# EAGLE board CT_schematic (EAGLE 7.6.0)

Size 100 x 80 mm. Coordinates in mm from the lower left corner, seen from the top.
Outline: 0,0 100,0 100,80 0,80 0,0
Copper layers (1*16): Top 0.035mm / dielectric 1.5mm / Bottom 0.035mm
Design rules "default": minimum track width 10mil, minimum drill 24mil, track to track 8mil, track to pad 8mil, pad to pad 8mil, via to via 8mil, smd to smd 8mil, copper to edge 40mil, drill to drill 8mil, minimum pad ring 10mil, minimum via ring 8mil, stop-mask expansion 4mil, vias tented up to drill 0mil, thermal gap 10mil

## Footprints (pad centres in the part's own frame; a part is rotated, then mirrored left to right if it is on the bottom)
C0603 = smd 0.8 x 0.8: 1 -0.762,0; 2 0.762,0
C0402 = smd 0.5 x 0.5: 1 -0.508,0; 2 0.508,0
C0805 = smd 1.2 x 1.3: 1 -1.016,0; 2 1.016,0
C1210 = smd 1.2 x 2.5: 1 -1.524,0; 2 1.524,0
C1206 = smd 1.3 x 1.6: 1 -1.524,0; 2 1.524,0
L0603 = smd 0.8 x 0.8: 1 -0.762,0; 2 0.762,0
DR1040 = smd 1.6 x 3.2: 1 -4.458,0; 2 4.458,0
R0603 = smd 0.8 x 0.8: 1 -0.762,0; 2 0.762,0
LQFP48 = smd 0.3 x 1.2: 1 -2.75,-4.25; 2 -2.25,-4.25; 3 -1.75,-4.25; 4 -1.25,-4.25; 5 -0.75,-4.25; 6 -0.25,-4.25; 7 0.25,-4.25; 8 0.75,-4.25; 9 1.25,-4.25; 10 1.75,-4.25; 11 2.25,-4.25; 12 2.75,-4.25; 25 2.75,4.25; 26 2.25,4.25; 27 1.75,4.25; 28 1.25,4.25; 29 0.75,4.25; 30 0.25,4.25; 31 -0.25,4.25; 32 -0.75,4.25; 33 -1.25,4.25; 34 -1.75,4.25; 35 -2.25,4.25; 36 -2.75,4.25 | smd 1.2 x 0.3: 13 4.25,-2.75; 14 4.25,-2.25; 15 4.25,-1.75; 16 4.25,-1.25; 17 4.25,-0.75; 18 4.25,-0.25; 19 4.25,0.25; 20 4.25,0.75; 21 4.25,1.25; 22 4.25,1.75; 23 4.25,2.25; 24 4.25,2.75; 37 -4.25,2.75; 38 -4.25,2.25; 39 -4.25,1.75; 40 -4.25,1.25; 41 -4.25,0.75; 42 -4.25,0.25; 43 -4.25,-0.25; 44 -4.25,-0.75; 45 -4.25,-1.25; 46 -4.25,-1.75; 47 -4.25,-2.25; 48 -4.25,-2.75
SAMTEC_FTSH-105-01-L-DV-K = smd 0.762 x 2.794: 1 -2.54,-2.032; 2 -2.54,2.032; 3 -1.27,-2.032; 4 -1.27,2.032; 5 0,-2.032; 6 0,2.032; 7 1.27,-2.032; 8 1.27,2.032; 9 2.54,-2.032; 10 2.54,2.032
SOIC-8 = smd 1.6 x 0.6: 1 -2.7,1.905 | smd 1.55 x 0.6: 2 -2.7,0.635; 3 -2.7,-0.635; 4 -2.7,-1.905; 5 2.7,-1.905; 6 2.7,-0.635; 7 2.7,0.635; 8 2.7,1.905
WNG008 = smd 0.45 x 0.55: 1 -1.27,0; 2 0,0; 3 1.27,0; 4 2.54,0; 5 2.54,7.5; 6 1.27,7.5; 7 0,7.5; 8 -1.27,7.53 | smd 4.9 x 4.75: PAD 0.635,3.75
TSSOP20-I = smd 0.4 x 1.35: 1 -2.925,-2.875; 2 -2.275,-2.875; 3 -1.625,-2.875; 4 -0.975,-2.875; 5 -0.325,-2.875; 6 0.325,-2.875; 7 0.975,-2.875; 8 1.625,-2.875; 9 2.275,-2.875; 10 2.925,-2.875; 11 2.925,2.875; 12 2.275,2.875; 13 1.625,2.875; 14 0.975,2.875; 15 0.325,2.875; 16 -0.325,2.875; 17 -0.975,2.875; 18 -1.625,2.875; 19 -2.275,2.875; 20 -2.925,2.875
182-009-MALE = drill 1.194 pad 1.524 octagon: 1 -5.537,10.923; 2 -2.769,10.923; 3 0,10.923; 4 2.769,10.923; 5 5.537,10.923; 6 -4.153,8.08; 7 -1.384,8.08; 8 1.384,8.08; 9 4.153,8.08 | hole 3.048: -12.446,9.501; 12.446,9.501
SSOP-28 = smd 1.5 x 0.4: 1 -3.625,4.225; 2 -3.625,3.575; 3 -3.625,2.925; 4 -3.625,2.275; 5 -3.625,1.625; 6 -3.625,0.975; 7 -3.625,0.325; 8 -3.625,-0.325; 9 -3.625,-0.975; 10 -3.625,-1.625; 11 -3.625,-2.275; 12 -3.625,-2.925; 13 -3.625,-3.575; 14 -3.625,-4.225; 15 3.625,-4.225; 16 3.625,-3.575; 17 3.625,-2.925; 18 3.625,-2.275; 19 3.625,-1.625; 20 3.625,-0.975; 21 3.625,-0.325; 22 3.625,0.325; 23 3.625,0.975; 24 3.625,1.625; 25 3.625,2.275; 26 3.625,2.925; 27 3.625,3.575; 28 3.625,4.225
ABLS-25.000MHZ-B2F-T = smd 5.6 x 2.8: 1 -3.81,0; 2 5.69,0
ASEK = smd 1.4 x 1: 1 -1.1,-0.8; 2 1.1,-0.8; 3 1.1,0.8; 4 -1.1,0.8
TSOT-23-5 = smd 1.3 x 0.62: 1 -1.31,0.95; 2 -1.31,0; 3 -1.31,-0.95; 4 1.31,-0.95; 5 1.31,0.95
SOIC-8_EP = smd 1.6 x 0.533: 1 -2.921,1.905; 2 -2.921,0.635; 3 -2.921,-0.635; 4 -2.921,-1.905; 5 2.921,-1.905; 6 2.921,-0.635; 7 2.921,0.635; 8 2.921,1.905 | smd 2.54 x 3.302: EPAD 0,0 | drill 0.406 pad 0.406: P$1 -0.508,0.635; P$2 0.381,0.635; P$3 -0.508,-0.635; P$4 0.381,-0.635
DFN8_2X3MC = smd 0.813 x 0.305: 1 -1.398,0.75; 2 -1.398,0.25; 3 -1.398,-0.25; 4 -1.398,-0.75; 5 1.398,-0.75; 6 1.398,-0.25; 7 1.398,0.25; 8 1.398,0.75 | smd 1.753 x 1.549: 9 0,0
JST-2-SMD = smd 1 x 4.6: 1 -1,-3.7; 2 1,-3.7 | smd 1.6 x 3.4: NC1 -3.4,1.5; NC2 3.4,1.5
FCI_10118193-0001LF = smd 0.4 x 1.35: 1 -1.3,2.675; 2 -0.65,2.675; 3 0,2.675; 4 0.65,2.675; 5 1.3,2.675 | smd 1.6 x 1.4: 6 -3.2,2.45; 7 3.2,2.45 | smd 1.9 x 1.9: 8 -1.2,0; 9 1.2,0 | hole 0.5: -3.3,0; 3.3,0
SON-6 = smd 0.55 x 0.3: 1 -0.355,0.5 | smd 0.52 x 0.3: 2 -0.37,0; 3 -0.37,-0.5; 4 0.37,-0.5; 5 0.37,0; 6 0.37,0.5
RUT0012A = smd 0.7 x 0.2: 1 -0.7,0.8; 2 -0.7,0.4; 3 -0.7,0; 4 -0.7,-0.4; 5 -0.7,-0.8; 7 0.7,-0.8; 8 0.7,-0.4; 9 0.7,0; 10 0.7,0.4; 11 0.7,0.8 | smd 0.2 x 0.7: 6 0,-0.85; 12 0,0.85
SW_4-1437565-2 = smd 1.4 x 2.1: 1 -2.23,4.55; 2 -2.23,-4.55; 3 2.23,4.55; 4 2.23,-4.55
LGM67K-G1J2-24-Z = smd 0.8 x 1.4: A -2,0; C 0,0
NC7SZ125M5X = smd 1.3 x 0.7: 1 -1.3,0.95; 2 -1.3,0; 3 -1.3,-0.95; 4 1.3,-0.95; 5 1.3,0.95

## Placement (x,y rotation side)
C1  1e-06  [C0603]  -33.02,92.71 0 top  (outside the outline)
C2  1e-07  [C0603]  -36.83,92.71 0 top  (outside the outline)
C3  1e-07  [C0603]  -40.64,92.71 0 top  (outside the outline)
C4  1e-07  [C0603]  -44.45,92.71 0 top  (outside the outline)
C5  1e-07  [C0603]  -48.26,92.71 0 top  (outside the outline)
C6  1e-07  [C0603]  -52.07,92.71 0 top  (outside the outline)
C7  4.7e-06  [C0603]  -29.21,92.71 0 top  (outside the outline)
C8  1e-08  [C0603]  -55.88,92.71 0 top  (outside the outline)
C9  1e-06  [C0603]  -59.69,92.71 0 top  (outside the outline)
C10  1e-11  [C0402]  -26.67,97.79 0 top  (outside the outline)
C11  1e-11  [C0402]  -30.48,97.79 0 top  (outside the outline)
C12  1e-07  [C0402]  -34.29,97.79 0 top  (outside the outline)
C13  1e-08  [C0402]  -38.1,97.79 0 top  (outside the outline)
C14  1e-08  [C0402]  -41.91,97.79 0 top  (outside the outline)
C15  1e-07  [C0402]  -45.72,97.79 0 top  (outside the outline)
C16  1e-07  [C0402]  -49.53,97.79 0 top  (outside the outline)
C17  1e-07  [C0402]  -53.34,97.79 0 top  (outside the outline)
C18  1e-07  [C0402]  -57.15,97.79 0 top  (outside the outline)
C19  1e-07  [C0402]  -60.96,97.79 0 top  (outside the outline)
C20  1e-07  [C0402]  -64.77,97.79 0 top  (outside the outline)
C21  1e-07  [C0402]  -68.58,97.79 0 top  (outside the outline)
C22  1e-07  [C0402]  -72.39,97.79 0 top  (outside the outline)
C23  1e-07  [C0402]  -76.2,97.79 0 top  (outside the outline)
C24  1e-07  [C0402]  -80.01,97.79 0 top  (outside the outline)
C25  1e-07  [C0402]  -83.82,97.79 0 top  (outside the outline)
C26  1e-08  [C0402]  -87.63,97.79 0 top  (outside the outline)
C27  1e-05  [C0805]  -53.34,81.28 0 top  (outside the outline)
C28  1e-05  [C0805]  -58.42,81.28 0 top  (outside the outline)
C29  1e-05  [C1210]  -80.01,73.66 0 top  (outside the outline)
C30  1e-05  [C1210]  -86.36,73.66 0 top  (outside the outline)
C31  1e-05  [C1210]  -16.51,82.55 0 top  (outside the outline)
C32  1e-05  [C1210]  -22.86,82.55 0 top  (outside the outline)
C33  1e-07  [C0402]  -15.24,102.87 0 top  (outside the outline)
C34  1e-05  [C1206]  -29.21,81.28 0 top  (outside the outline)
C35  1e-05  [C1206]  -35.56,81.28 0 top  (outside the outline)
C36  1e-08  [C0402]  -19.05,102.87 0 top  (outside the outline)
C37  1e-07  [C0402]  -22.86,102.87 0 top  (outside the outline)
C38  1e-08  [C0402]  -26.67,102.87 0 top  (outside the outline)
C39  1e-07  [C0402]  -30.48,102.87 0 top  (outside the outline)
C40  1e-08  [C0402]  -34.29,102.87 0 top  (outside the outline)
C41  1e-08  [C0402]  -38.1,102.87 0 top  (outside the outline)
F1  240.0  [L0603]  -63.5,92.71 0 top  (outside the outline)
I1  5.2e-06  [DR1040]  -82.55,49.53 0 top  (outside the outline)
R1  10000.0  [R0603]  -25.4,87.63 0 top  (outside the outline)
R2  1000.0  [R0603]  -67.31,92.71 0 top  (outside the outline)
R3  910.0  [R0603]  -71.12,92.71 0 top  (outside the outline)
R4  4700.0  [R0603]  -74.93,92.71 0 top  (outside the outline)
R5  2200.0  [R0603]  -78.74,92.71 0 top  (outside the outline)
R6  2200.0  [R0603]  -82.55,92.71 0 top  (outside the outline)
R7  10000.0  [R0603]  -30.48,87.63 0 top  (outside the outline)
R8  10000.0  [R0603]  -35.56,87.63 0 top  (outside the outline)
R9  10000.0  [R0603]  -40.64,87.63 0 top  (outside the outline)
R10  10000.0  [R0603]  -45.72,87.63 0 top  (outside the outline)
R11  10000.0  [R0603]  -50.8,87.63 0 top  (outside the outline)
R12  5.0  [R0603]  -86.36,92.71 0 top  (outside the outline)
R13  10000.0  [R0603]  -55.88,87.63 0 top  (outside the outline)
R14  10000.0  [R0603]  -60.96,87.63 0 top  (outside the outline)
R15  10000.0  [R0603]  -66.04,87.63 0 top  (outside the outline)
R16  10000.0  [R0603]  -71.12,87.63 0 top  (outside the outline)
R17  10000.0  [R0603]  -76.2,87.63 0 top  (outside the outline)
R18  10000.0  [R0603]  -81.28,87.63 0 top  (outside the outline)
R19  100000.0  [R0603]  -76.2,81.28 0 top  (outside the outline)
R20  490000.0  [R0603]  -81.28,81.28 0 top  (outside the outline)
R21  1000000.0  [R0603]  -71.12,81.28 0 top  (outside the outline)
R22  3600.0  [R0603]  -15.24,97.79 0 top  (outside the outline)
R23  2200.0  [R0603]  -19.05,97.79 0 top  (outside the outline)
R24  10000.0  [R0603]  -86.36,87.63 0 top  (outside the outline)
R25  10000.0  [R0603]  -15.24,92.71 0 top  (outside the outline)
R26  82000.0  [R0603]  -20.32,92.71 0 top  (outside the outline)
R27  300000.0  [R0603]  -86.36,81.28 0 top  (outside the outline)
R28  120000.0  [R0603]  -15.24,87.63 0 top  (outside the outline)
R29  2000.0  [R0603]  -22.86,97.79 0 top  (outside the outline)
R30  10000.0  [R0603]  -25.4,92.71 0 top  (outside the outline)
R31  200000.0  [R0603]  -20.32,87.63 0 top  (outside the outline)
U1  STM32F358CCT6  [LQFP48]  -58.42,64.77 0 top  (outside the outline)
U2  FTSH-105-01-L-DV-K  [SAMTEC_FTSH-105-01-L-DV-K]  -35.56,52.07 0 top  (outside the outline)
U3  24AA1025T-I/SN  [SOIC-8]  -73.66,63.5 0 top  (outside the outline)
U4  S25FL128SDPNFI001  [WNG008]  -29.21,62.23 0 top  (outside the outline)
U5  SP3203ECY-L/TR  [TSSOP20-I]  -72.39,49.53 0 top  (outside the outline)
U6  182-009-113R531  [182-009-MALE]  -36.83,6.35 0 top  (outside the outline)
U7  ST3241EBPR  [SSOP-28]  -58.42,30.48 0 top  (outside the outline)
U8  182-009-113R531  [182-009-MALE]  -36.83,27.94 0 top  (outside the outline)
U9  ABLS-25.000MHZ-B2F-T  [ABLS-25.000MHZ-B2F-T]  -48.26,74.93 0 top  (outside the outline)
U10  ASEK-2-32.768KHz-ECST  [ASEK]  -31.75,74.93 0 top  (outside the outline)
U11  ltc3406es5  [TSOT-23-5]  -63.5,81.28 0 top  (outside the outline)
U12  MIC5234YME  [SOIC-8_EP]  -59.69,73.66 0 top  (outside the outline)
U13  MCP73831T-2ACI/MC  [DFN8_2X3MC]  -63.5,101.6 0 top  (outside the outline)
U14  S2B-PH-SM4-TB(LF)(SN)  [JST-2-SMD]  -41.91,66.04 0 top  (outside the outline)
U15  10118193-0001LF  [FCI_10118193-0001LF]  -83.82,62.23 0 top  (outside the outline)
U16  TPS3895ADRYR  [SON-6]  -57.15,101.6 0 top  (outside the outline)
U17  LSF0204DRUTR  [RUT0012A]  -52.07,102.87 0 top  (outside the outline)
U18  4-1437565-2  [SW_4-1437565-2]  -57.15,49.53 0 top  (outside the outline)
U19  Q65110A2395  [LGM67K-G1J2-24-Z]  -68.58,73.66 0 top  (outside the outline)
U20  nc7sz125m5x  [NC7SZ125M5X]  -40.64,81.28 0 top  (outside the outline)
U21  nc7sz125m5x  [NC7SZ125M5X]  -46.99,81.28 0 top  (outside the outline)

## Library data of the parts
C1-C41 F1 I1 R1-R31 U1-U21 = circuit_tree

## Nets
CLK_CRYSTAL_U1_5: C10.1 U1.5 U9.1
CLK_CRYSTAL_U1_6: C11.1 U1.6 U9.2
CLK_U1_3: U1.3 U10.3
GND: C1.2 C2.2 C3.2 C4.2 C5.2 C6.2 C7.2 C8.2 C9.2 C10.2 C11.2 C12.2 C13.2 C14.2 C15.2 C16.2 C19.2 C20.2 C21.2 C24.2 C25.2 C26.2 C27.2 C28.1 C28.2 C29.2 C30.2 C31.2 C32.2 C33.2 C34.2 C35.2 C36.2 C37.2 C38.2 C39.2 C40.2 C41.2 R2.2 R7.2 R8.2 R12.2 R15.2 R20.2 R23.2 R26.2 R28.2 R29.2 U1.8 U1.23 U1.35 U1.47 U2.3 U2.5 U3.4 U4.4 U4.PAD U5.18 U6.5 U7.23 U7.25 U8.5 U10.2 U11.2 U12.7 U12.EPAD U13.6 U13.9 U14.2 U15.5 U15.6 U15.7 U15.8 U15.9 U16.2 U17.6 U19.C U20.2 U20.3 U21.1 U21.3
INPUT_USBPOWER_5V: C34.1 R30.2 U13.1 U13.2 U15.1
NET_U1_7: R4.1 U1.7 U21.4
NET_U1_9: C8.1 C9.1 F1.1 U1.9
NET_U1_20: R8.1 U1.20
NET_U1_38: R5.1 U1.38 U3.6
NET_U1_43: R6.1 U1.43 U3.5
NET_U1_44: R7.1 U1.44
NET_U1_45: R3.1 U1.45 U19.A
NET_U1_46: R1.1 U1.46 U18.3 U18.4
NET_U2_9: R12.1 U2.9
NET_U3_1: R14.1 U3.1
NET_U3_2: R15.1 U3.2
NET_U3_3: R13.1 U3.3
NET_U4_3: R16.1 U4.3
NET_U4_7: R18.1 U4.7
NET_U5_1: C17.1 U5.1
NET_U5_2: C19.1 U5.2
NET_U5_3: C17.2 U5.3
NET_U5_4: C18.1 U5.4
NET_U5_5: C18.2 U5.5
NET_U5_6: C20.1 U5.6
NET_U5_20: U5.20
NET_U6_2: U5.14 U6.2
NET_U6_3: U5.17 U6.3
NET_U6_7: U5.13 U6.7
NET_U6_8: U5.16 U6.8
NET_U7_1: C23.1 U7.1
NET_U7_2: C23.2 U7.2
NET_U7_3: C25.1 U7.3
NET_U7_22: R19.1 U7.22
NET_U7_24: C22.2 U7.24
NET_U7_27: C24.1 U7.27
NET_U7_28: C22.1 U7.28
NET_U8_2: U7.4 U8.2
NET_U8_3: U7.9 U8.3
NET_U8_7: U7.5 U8.7
NET_U8_8: U7.10 U8.8
NET_U11_1: U11.1
NET_U11_3: I1.1 U11.3
NET_U11_5: R20.1 R21.1 U11.5
NET_U11_ATNET_3: I1.2 R21.2
NET_U12_4: R22.2 R23.1 U12.4
NET_U13_5: R30.1 U13.5
NET_U13_8: R29.1 U13.8
NET_U16_1: R25.1 R26.1 U16.1
NET_U16_3: R27.2 R28.1 U16.3
NET_U16_4: R24.1 U16.4 U20.4 U21.2
NET_U17_12: R31.1 U17.12
NET_U18_1: R2.1 U18.1 U18.2
PROC_SPI1_MISO: U1.16 U4.2
PROC_SPI1_MOSI: U1.17 U4.5
PROC_SPI1_NSS: R17.1 U1.14 U4.1
PROC_SPI1_SCK: U1.15 U4.6
PROC_SYS_JTCK_SWCLK: R10.1 U1.37 U2.4
PROC_SYS_JTDO_TRACESWO: U1.39 U2.6
PROC_SYS_JTMS_SWDIO: R11.1 U1.34 U2.2
PROC_USART1_CTS: U1.32 U5.8
PROC_USART1_RTS: U1.33 U5.10
PROC_USART1_RX: U1.31 U5.11
PROC_USART1_TX: U1.30 U5.7
PROC_USART2_CTS_TOIOBUF: U1.10 U17.2
PROC_USART2_CTS_TOXCVR: U7.13 U17.10
PROC_USART2_RTS_TOIOBUF: U1.11 U17.4
PROC_USART2_RTS_TOXCVR: U7.18 U17.8
PROC_USART2_RX_TOIOBUF: U1.13 U17.5
PROC_USART2_RX_TOXCVR: U7.19 U17.7
PROC_USART2_TX_TOIOBUF: U1.12 U17.3
PROC_USART2_TX_TOXCVR: U7.14 U17.9
RST_OUT_U2_JTAG_RST_B: R9.1 U2.10 U20.1
VCC_S1_3V7: C27.1 C29.1 C30.1 C35.1 U11.4 U12.5 U12.8 U13.3 U13.4 U14.1
VCC_TIER1_1V8: C1.1 C2.1 C3.1 C4.1 C5.1 C6.1 C7.1 C12.1 C13.1 C14.1 C16.1 C26.1 C28.2 C33.1 C38.1 C39.1 C40.1 C41.1 F1.2 I1.2 R1.2 R3.2 R4.2 R5.2 R6.2 R9.2 R10.2 R11.2 R13.2 R14.2 R16.2 R17.2 R18.2 R21.2 R24.2 R25.2 R27.1 R31.2 U1.1 U1.24 U1.36 U1.48 U2.1 U3.7 U3.8 U4.8 U5.12 U10.4 U16.6 U17.1 U20.5 U21.5
VCC_TIER1_3V0: C15.1 C21.1 C31.1 C32.1 C36.1 C37.1 R19.2 R22.1 U5.19 U7.26 U12.1 U17.11

## Tracks (layer width: path | path; a pad name or v marks a point on that pad's centre or on a via)
CLK_CRYSTAL_U1_5  (2 unrouted)
CLK_CRYSTAL_U1_6  (2 unrouted)
CLK_U1_3  (1 unrouted)
GND  (80 unrouted)
INPUT_USBPOWER_5V  (4 unrouted)
NET_U1_7  (2 unrouted)
NET_U1_9  (3 unrouted)
NET_U1_20  (1 unrouted)
NET_U1_38  (2 unrouted)
NET_U1_43  (2 unrouted)
NET_U1_44  (1 unrouted)
NET_U1_45  (2 unrouted)
NET_U1_46  (3 unrouted)
NET_U2_9  (1 unrouted)
NET_U3_1  (1 unrouted)
NET_U3_2  (1 unrouted)
NET_U3_3  (1 unrouted)
NET_U4_3  (1 unrouted)
NET_U4_7  (1 unrouted)
NET_U5_1  (1 unrouted)
NET_U5_2  (1 unrouted)
NET_U5_3  (1 unrouted)
NET_U5_4  (1 unrouted)
NET_U5_5  (1 unrouted)
NET_U5_6  (1 unrouted)
NET_U6_2  (1 unrouted)
NET_U6_3  (1 unrouted)
NET_U6_7  (1 unrouted)
NET_U6_8  (1 unrouted)
NET_U7_1  (1 unrouted)
NET_U7_2  (1 unrouted)
NET_U7_3  (1 unrouted)
NET_U7_22  (1 unrouted)
NET_U7_24  (1 unrouted)
NET_U7_27  (1 unrouted)
NET_U7_28  (1 unrouted)
NET_U8_2  (1 unrouted)
NET_U8_3  (1 unrouted)
NET_U8_7  (1 unrouted)
NET_U8_8  (1 unrouted)
NET_U11_3  (1 unrouted)
NET_U11_5  (2 unrouted)
NET_U11_ATNET_3  (1 unrouted)
NET_U12_4  (2 unrouted)
NET_U13_5  (1 unrouted)
NET_U13_8  (1 unrouted)
NET_U16_1  (2 unrouted)
NET_U16_3  (2 unrouted)
NET_U16_4  (3 unrouted)
NET_U17_12  (1 unrouted)
NET_U18_1  (2 unrouted)
PROC_SPI1_MISO  (1 unrouted)
PROC_SPI1_MOSI  (1 unrouted)
PROC_SPI1_NSS  (2 unrouted)
PROC_SPI1_SCK  (1 unrouted)
PROC_SYS_JTCK_SWCLK  (2 unrouted)
PROC_SYS_JTDO_TRACESWO  (1 unrouted)
PROC_SYS_JTMS_SWDIO  (2 unrouted)
PROC_USART1_CTS  (1 unrouted)
PROC_USART1_RTS  (1 unrouted)
PROC_USART1_RX  (1 unrouted)
PROC_USART1_TX  (1 unrouted)
PROC_USART2_CTS_TOIOBUF  (1 unrouted)
PROC_USART2_CTS_TOXCVR  (1 unrouted)
PROC_USART2_RTS_TOIOBUF  (1 unrouted)
PROC_USART2_RTS_TOXCVR  (1 unrouted)
PROC_USART2_RX_TOIOBUF  (1 unrouted)
PROC_USART2_RX_TOXCVR  (1 unrouted)
PROC_USART2_TX_TOIOBUF  (1 unrouted)
PROC_USART2_TX_TOXCVR  (1 unrouted)
RST_OUT_U2_JTAG_RST_B  (2 unrouted)
VCC_S1_3V7  (9 unrouted)
VCC_TIER1_1V8  (51 unrouted)
VCC_TIER1_3V0  (11 unrouted)